# EAGLE board PCB_design (EAGLE 8.5.1)
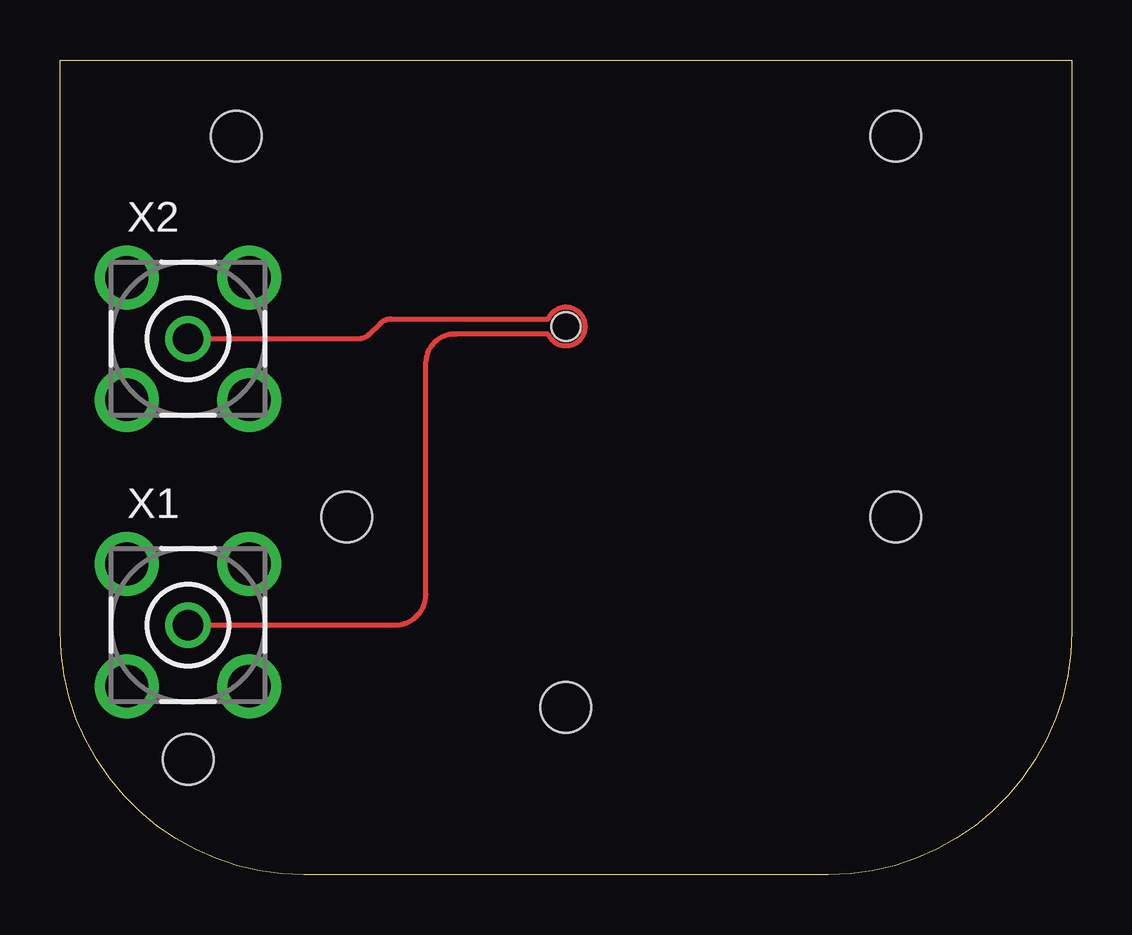
[diagram p0: board, top side]
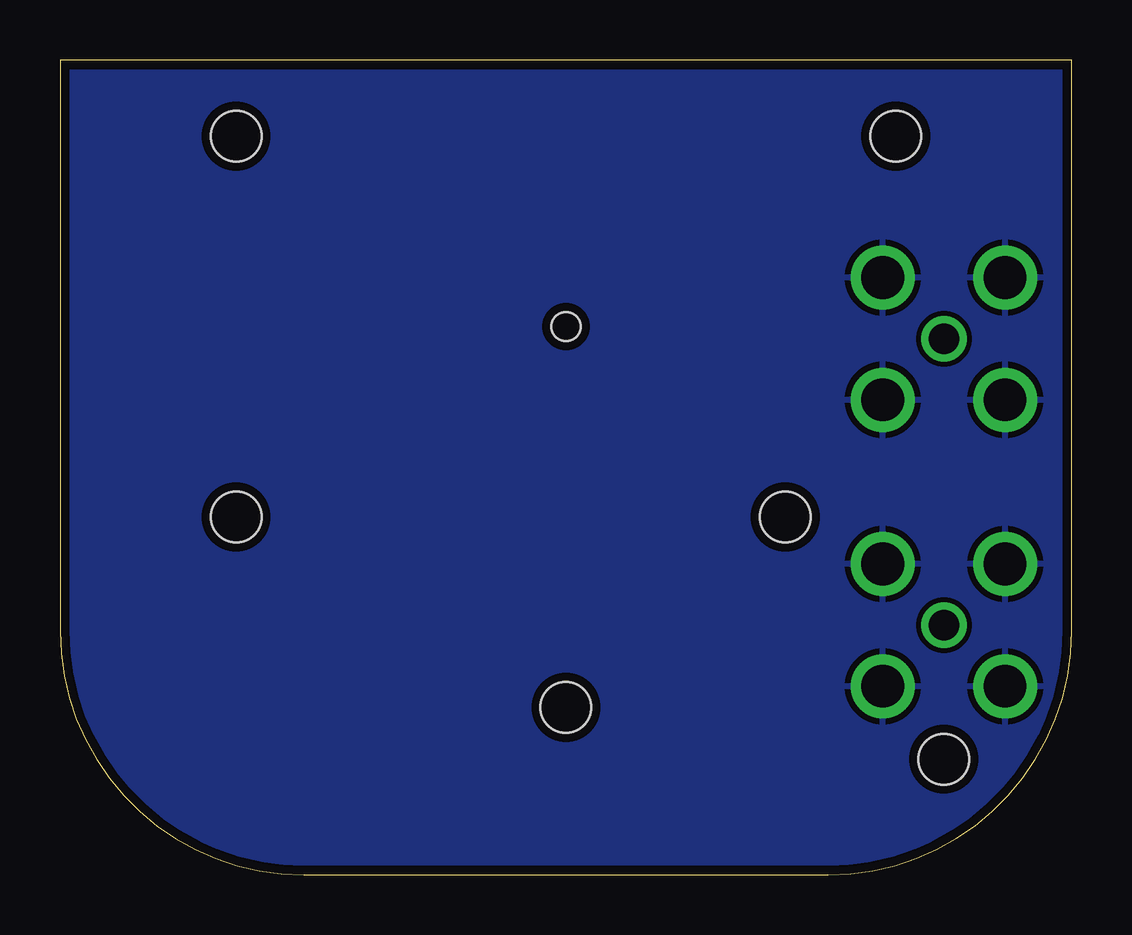
[diagram p1: board, bottom side, seen from below]

Size 42.16 x 33.97 mm. Coordinates in mm from the lower left corner, seen from the top.
Outline: 42.16,33.97 42.16,10.16 arc-90 32,0 10.16,0 arc-90 0,10.16 0,33.97 42.16,33.97
Copper layers (1*16): Top 0.035mm / dielectric 1.5mm / Bottom 0.035mm
Design rules "default *": minimum track width 6mil, minimum drill 0.35mm, track to track 6mil, track to pad 6mil, pad to pad 6mil, via to via 6mil, smd to smd 6mil, copper to edge 15mil, drill to drill 6mil, minimum pad ring 10mil, minimum via ring 8mil, stop-mask expansion 4mil, vias tented up to drill 0mil, thermal gap 10mil
Net classes: 0 default: clearance 0.205 mm
Holes 1.2 mm at 21.08,22.86
Holes 2.11 mm at 7.34,30.8 34.83,30.8 21.08,6.99 5.33,4.83 34.83,14.92 11.94,14.93

## Footprints (pad centres in the part's own frame; a part is rotated, then mirrored left to right if it is on the bottom)
BU-SMA-V = drill 1.27: 1 0,0 | drill 1.778: 2 -2.55,2.55; 3 2.55,2.55; 4 2.55,-2.55; 5 -2.55,-2.55

## Placement (x,y rotation side)
X1  BU-SMA-V  [BU-SMA-V]  5.33,10.41 0 top
X2  BU-SMA-V  [BU-SMA-V]  5.33,22.35 0 top

## Library data of the parts
X1 X2 = con-coax; OC_FARNELL: unknown; OC_NEWARK: unknown

## Nets
GND: X1.2 X1.3 X1.4 X1.5 X2.2 X2.3 X2.4 X2.5

## Tracks (layer width: path | path; a pad name or v marks a point on that pad's centre or on a via)
GND
  pour Bottom: 0,33.97 42.16,33.97 42.16,10.17 arc-90 32,0.01 10.15,0.02 arc-90 0,10.18
S$1
  Top 0.21: 5.33,10.41 13.97,10.41 arc90 15.24,11.68 15.24,21.4 arc-90 16.51,22.55 20.34,22.55 arc314 20.34,23.18 13.79,23.18 arc45 13.34,22.99 12.89,22.54 arc-45 12.44,22.35 5.33,22.35